# Altium PCB uart_key.PcbDoc
Units mm, origin at the board's own origin, x right, y up, seen from the top; angles counter-clockwise.
Board outline 80.99 x 54 mm, 2 copper layers (Top Layer, Bottom Layer); 71 components, 46 nets, 382 pads, 76 vias.
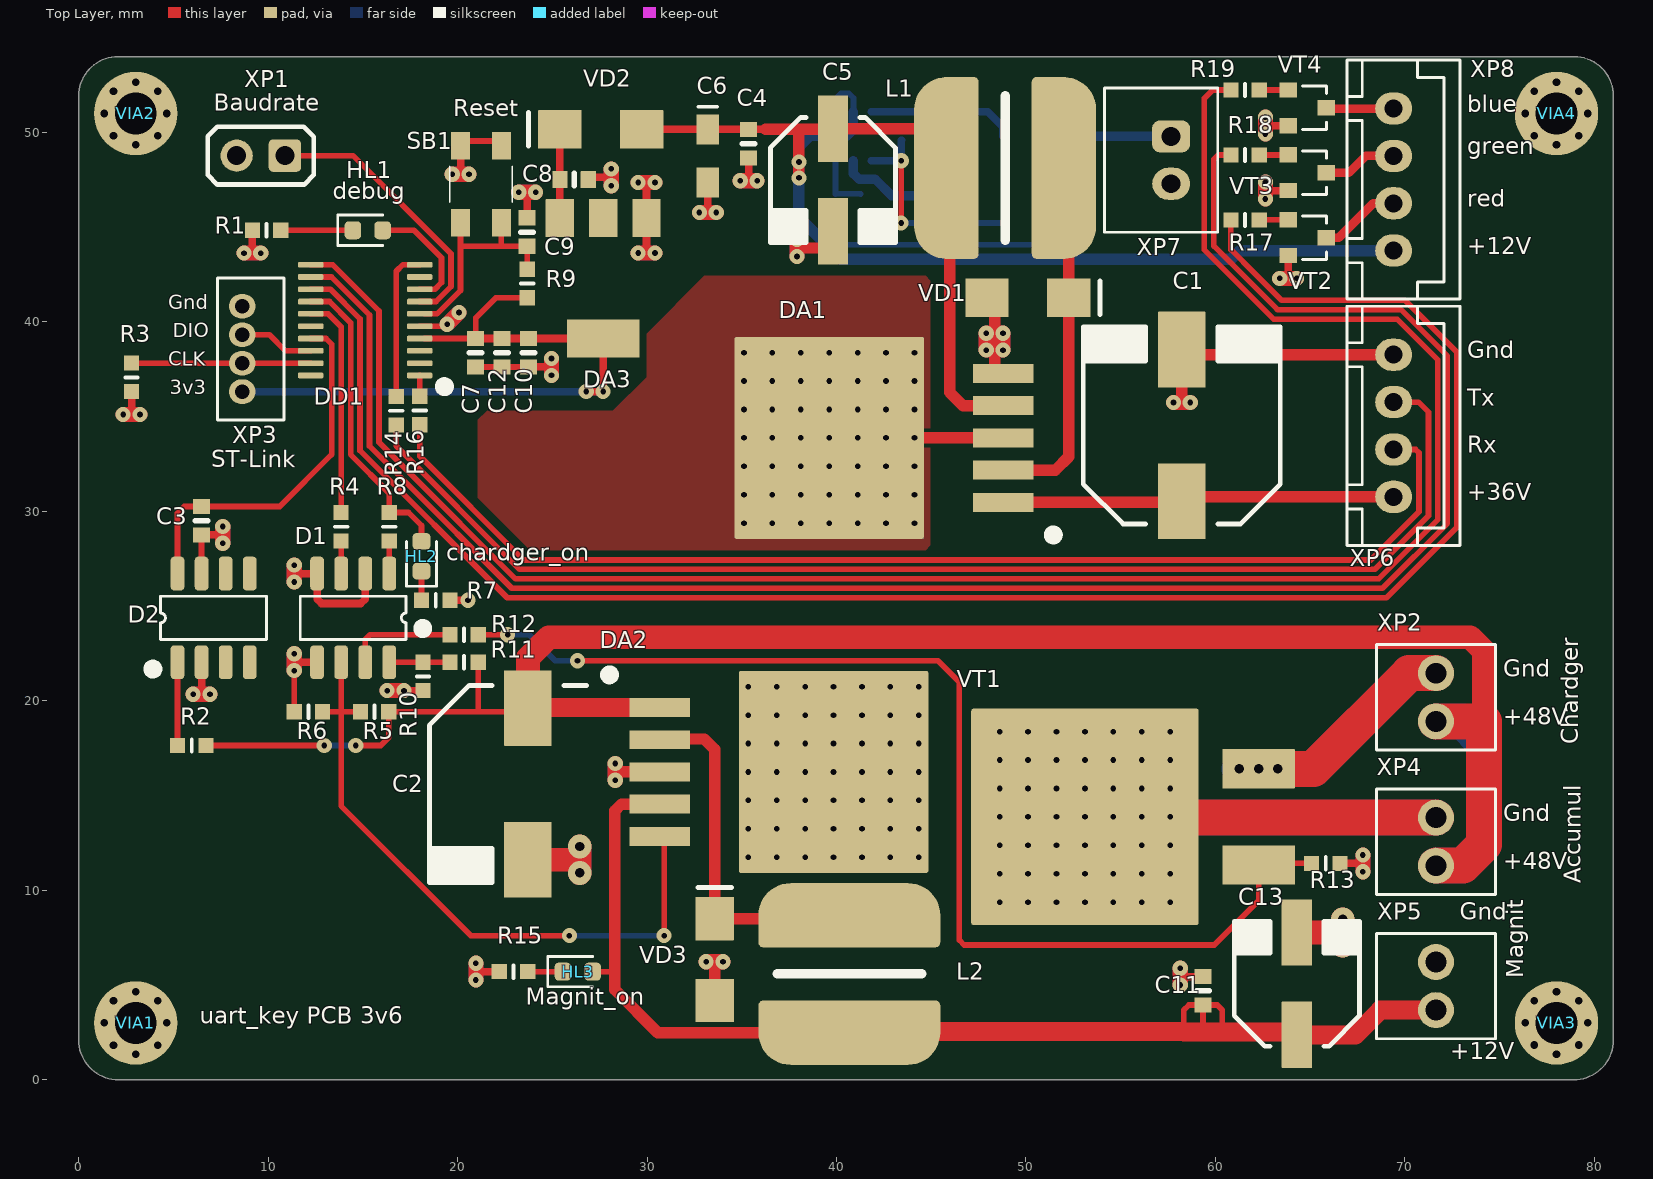
[diagram p0: Top Layer view]
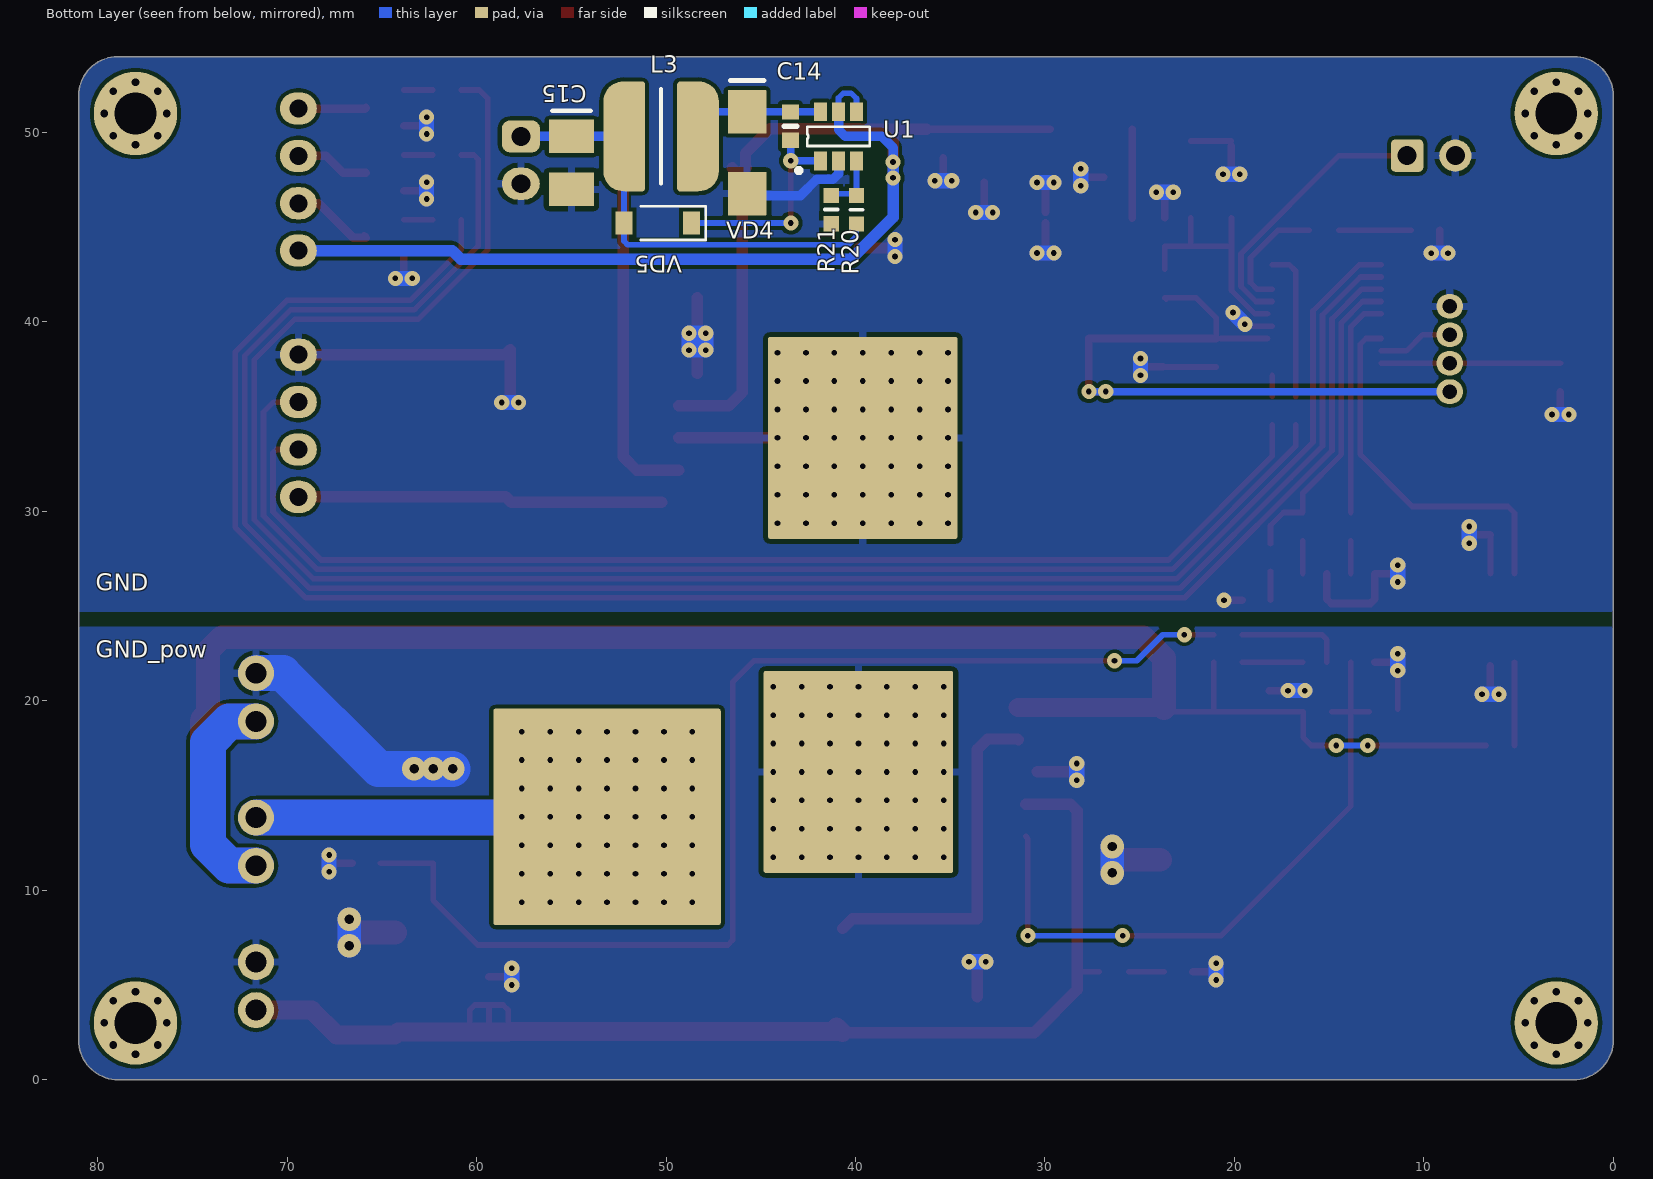
[diagram p1: Bottom Layer view, seen from below]

## Layer stack, top to bottom
Top Solder: solder mask 0.0102, Solder Resist, Dk 3.5
Top Layer: signal copper 0.0356
Dielectric 1: dielectric 0.32, FR-4, Dk 4.8
Bottom Layer: signal copper 0.0356
Bottom Solder: solder mask 0.0102, Solder Resist, Dk 3.5

## Board outline
0.006,2.084 0.006,51.924 cw(c2.076,51.924) 2.076,53.994 78.931,53.994 cw(c78.93,51.924) 81,51.924 81,2.084 cw(c78.909,2.084) 78.909,-0.007 2.097,-0.006 cw(c2.097,2.084)

## Design rules (kind name [scope] priority, off if disabled: settings)
Clearance TestPointToPad [HasFootprint('TP_36_PAD') or HasFootprint('TP_38_PAD') or HasFootprint('TP_47_PAD') or HasFootprint('TP_50_PAD') or HasFootprint('TP_60_PAD') or HasFootprint('TP_80_PAD') or HasFootprint('TP_100_PAD') vs IsPad] p1: gap=0.22 ignorepadtopadclearanceinfootprint=FALSE except(0: Arc-Hole Track-Hole SMDPad-Hole THPad-Hole Via-Hole Fill-Hole Poly-Hole Region-Hole Text-Hole; 2: Arc-THPad Track-THPad SMDPad-THPad THPad-THPad)
Clearance [All] p2: gap=0.2 ignorepadtopadclearanceinfootprint=FALSE
ComponentClearance TestpointClearance [Footprint Like 'TP_36_PAD' or Footprint Like 'TP_38_PAD' or Footprint Like 'TP_47_PAD' or Footprint Like 'TP_50_PAD' or Footprint Like 'TP_60_PAD' or Footprint Like 'TP_80_PAD' or Footprint Like 'TP_100_PAD' vs Footprint Like 'TP_36_PAD' or Footprint Like 'TP_38_PAD' or Footprint Like 'TP_47_PAD' or Footprint Like 'TP_50_PAD' or Footprint Like 'TP_60_PAD' or Footprint Like 'TP_80_PAD' or Footprint Like 'TP_100_PAD'] p1: gap=0 collisioncheckmode=3 verticalgap=0.254 showdistances=FALSE
ComponentClearance [All] p2: gap=0.254 collisioncheckmode=3 verticalgap=0.254 showdistances=FALSE
DiffPairsRouting [All] p1: maxlimit=0.25 minlimit=0.2 mostfreqgap=0.22 toplayer_minwidth=0.2 toplayer_maxwidth=0.25 toplayer_prefwidth=0.22 bottomlayer_minwidth=0.2 bottomlayer_maxwidth=0.25 bottomlayer_prefwidth=0.22 maxuncoupledlength=12.7
HoleSize [All] p1: absolutevalues=TRUE maxlimit=4 minlimit=0.3 maxpercent=80.000 minpercent=20.000
MinimumSolderMaskSliver [All] p1: minsoldermaskwidth=0.1
PasteMaskExpansion [All] p1: expansion=-0.05
PlaneConnect [All] p1: planeconnectstyle=Relief reliefexpansion=0.508 reliefentries=4 reliefconductorwidth=0.4 reliefairgap=0.25
PolygonConnect PolygonConnect_1 [IsVia or InPadClass('Direct')] p1: connectstyle=Direct reliefconductorwidth=0.254 reliefentries=4 polygonreliefangle="90 Angle" airgapwidth=0.254
PolygonConnect [All] p2: connectstyle=Relief reliefconductorwidth=0.4 reliefentries=4 polygonreliefangle="90 Angle" airgapwidth=0.25
RoutingVias [All] p1: holewidth=0.3 width=1 viastyle="Through Hole" minholewidth=0.3 minwidth=0.7 maxholewidth=0.4 maxwidth=2.8
SilkToSilkClearance [All] p1: silktosilkclearance=0.2
SilkToSolderMaskClearance [IsPad] p1: minsilkscreentomaskgap=0.2 clearancetoexposedcopper=TRUE
SolderMaskExpansion [All] p1: expansion=0.1 istentingtop=FALSE
Width [All] p1: maxlimit=4 minlimit=0.22 preferedwidth=0.4
22 further rules are at their usual default settings.

## Components (designator, comment, footprint, x,y, rotation, side; value= is the part's Value field where it differs from the comment)
C1 "220uF 50V" CAPAE_SMD_1010 58.225,34.531 r270 top value=220uF
C2 "220uF 50V" CAPAE_SMD_1010 23.712,15.608 r90 top value=220uF
C3 "1uF 25V" CC0603_0.8mm 6.488,29.503 r270 top value=1uF
C4 "1uF 25V" CC0603_0.8mm 35.365,49.402 r270 top value=1uF
C5 "220uF 16V" CAPAE_SMD_0607 39.81,47.485 r90 top value=220uF
C6 "2.2uF 16V" TANT_3.2X1.6_A 33.206,48.752 r270 top value=2.2uF
C7 "0.15uF 50V" CC0603_0.8mm 20.955,38.366 r270 top value=0.15uF
C8 "10uF 25V" CC0603_0.8mm 26.15,47.498 r0 top value=10uF
C9 "1uF 25V" CC0603_0.8mm 23.673,44.737 r90 top value=1uF
C10 "10uF 25V" CC0603_0.8mm 23.749,38.366 r270 top value=10uF
C11 "1uF 25V" CC0603_0.8mm 59.345,4.686 r90 top value=1uF
C12 "0.15uF 50V" CC0603_0.8mm 22.352,38.366 r270 top value=0.15uF
C13 "220uF 16V" CAPAE_SMD_0607 64.298,5.067 r270 top value=220uF
C14 "0.01uF 50V" CC0603_0.8mm 43.434,50.329 r90 bottom value=0.01uF
C15 "22uF 10В" TANT_3.5X2.8_B 54.991,48.387 r90 bottom value=22uF
D1 "MOCD217R2M" SO-8_height 14.489,24.371 r180 top
D2 "MOCD217R2M" SO-8_height 7.123,24.371 r0 top
DA1 "LM2596HVGR-12" "TO-263-5 (D2PAK)_2_thermal_pad" 43.766,33.873 r180 top
DA2 "LM2596HVGR-12" "TO-263-5 (D2PAK)_2_thermal_pad" 35.693,16.242 r0 top
DA3 "AMS1117-3.3V" SOT-223 27.686,42.291 r90 top value=3.3V
DD1 "STM32G030F6" TSSOP-20_ST 15.124,40.091 r90 top
HL1 "led_1608_green" led_1608 14.478,44.831 r0 top
HL2 "led_1608_red" led_1608 18.095,26.841 r90 top
HL3 "led_1608_red" led_1608 25.56,5.702 r0 top
L1 "SDR1006 33uH" SDR1006 48.902,48.12 r180 top value=33uH
L2 "SDR1006 33uH" SDR1006 40.676,5.58 r270 top value=33uH
L3 "SDR0604 10uH" SDR0604 50.26,49.784 r0 bottom value=10uH
R1 "10k ±1%" R0603 9.918,44.831 r180 top value=10k
R2 "10k ±1%" R0603 5.968,17.64 r0 top value=10k
R3 "10k ±1%" R0603 2.794,37.066 r90 top value=10k
R4 "100 ±1%" R0603 13.854,29.185 r270 top value=100
R5 "10k ±1%" R0603 15.62,19.418 r180 top value=10k
R6 "10k ±1%" R0603 12.127,19.418 r180 top value=10k
R7 "10k ±1%" R0603 18.845,25.305 r0 top value=10k
R8 "100 ±1%" R0603 16.394,29.185 r270 top value=100
R9 "10k ±1%" R0603 23.673,42.019 r90 top value=10k
R10 "10k ±1%" R0603 18.172,21.281 r270 top value=10k
R11 "10k ±1%" R0603 20.344,22.031 r0 top value=10k
R12 "100 ±1%" R0603 20.344,23.482 r0 top value=100
R13 "10k ±1%" R0603 65.822,11.417 r0 top value=10k
R14 "100 ±1%" R0603 16.764,35.306 r270 top value=100
R15 "10k ±1%" R0603 22.951,5.702 r180 top value=10k
R16 "100 ±1%" R0603 17.999,35.318 r270 top value=100
R17 "100 ±1%" R0603 61.564,45.377 r0 top value=100
R18 "100 ±1%" R0603 61.564,48.806 r0 top value=100
R19 "100 ±1%" R0603 61.564,52.235 r0 top value=100
R20 "56k ±5%" R0603 39.947,45.91 r90 bottom value=56k
R21 "10k ±1%" R0603 41.275,45.922 r270 bottom value=10k
SB1 "KLS7-TS3401_4х3х2,5" KLS7-TS3401_4х3х2,5 20.161,45.233 r90 top
U1 "LM2734YMK" SOT-23-6 40.894,49.784 r270 bottom
VD1 "SS16" "DO-214AC (SMA)" 50.097,41.262 r180 top
VD2 "SS16" "DO-214AC (SMA)" 27.559,50.152 r0 top
VD3 "SS16" "DO-214AC (SMA)" 33.564,6.337 r270 top
VD4 "SS16" "DO-214AC (SMA)" 45.72,48.92 r270 bottom
VD5 "1N4148W" SOD-123 48.664,45.212 r0 bottom
VIA1 "via_circle_2.2mm" via_circle_2.2 3.006,2.994 r0 top
VIA2 "via_circle_2.2mm" via_circle_2.2 3.006,50.994 r0 top
VIA3 "via_circle_2.2mm" via_circle_2.2 78,2.994 r0 top
VIA4 "via_circle_2.2mm" via_circle_2.2 78,50.994 r0 top
VT1 "IRF630NSPBF" "TO-263A (D2PAK)_thermal_pad" 53.765,13.868 r180 top
VT2 "IRLML2060" SOT-23 64.842,44.437 r180 top
VT3 "IRLML2060" SOT-23 64.842,47.866 r180 top
VT4 "IRLML2060" SOT-23 64.842,51.295 r180 top
XP1 "Baudrate" PLS-2 9.612,48.768 r180 top
XP2 "Зарядное устройство" DG308x2 71.638,18.91 r90 top
XP3 "ST-Link" B4B-ZR 8.636,36.316 r90 top
XP4 "На аккумулятор" DG308x2 71.638,11.29 r90 top
XP5 "Магнит" DG308x2 71.638,3.67 r90 top
XP6 "COM" JST_XH_B4B-XH-A_1x04_P2.50mm_Vertical 69.401,30.761 r90 top
XP7 "Зарядное устройство на руле" B2B-XH-A 57.658,49.784 r270 top
XP8 "LED" JST_XH_B4B-XH-A_1x04_P2.50mm_Vertical 69.401,43.755 r90 top

## Footprints (in the part's own frame and the unit in brackets; to place one, negate y for a bottom-side part, rotate by r counter-clockwise, add the part's x,y. Pads: shape width x height; smd on the part's side, far side on the other; paste and mask are expansions set on the pad)
B2B-XH-A [mm]
  rrect50% 1.7x2 hole 1: 1(0,0)
  oval 1.7x2 hole 1: 2(2.5,0)
  silkscreen extent -2.56,-3.51 5.06,2.46, body extent -2.45,-3.4 4.95,2.35, height 7
B4B-ZR [mm]
  oval 1.3x1.4 hole 0.762: 1(0,0) 2(1.5,0) 3(3,0) 4(4.5,0)
  silkscreen extent -1.5,-2.2 6,1.3, body extent -1.5,-2.2 6,1.3, height 4.5
CAPAE_SMD_0607 [mm] "SMD Aluminum Electrolytic Capacitor. DxL = 6.3x7.7mm."
  rrect2% 3.5x1.6 smd paste-10.05: 1(-2.7,0) 2(2.7,0)
  silkscreen extent -3.3,-3.3 3.3,3.3, body extent -3.6,-3.3 3.6,3.3, height 7.7
CAPAE_SMD_1010 [mm] "SMD Aluminum Electrolytic Capacitor. DxL = 10.0x10.0mm."
  rrect2% 4x2.5 smd paste-10.05: 1(-4,0) 2(4,0)
  silkscreen extent -5.2,-5.2 5.2,5.2, body extent -5.5,-5.2 5.5,5.2, height 10
CC0603_0.8mm [mm] "Yageo/ Radiused inverted home plate (RIHP) paste"
  rrect2% 0.8x0.9 smd paste-2: 1(-0.75,0) 2(0.75,0)
  Top Layer pour cut-out: -0.375,0.65 -0.375,-0.65 0.375,-0.65 0.375,0.65
  silkscreen extent 0,-0.33 0,0.33, body extent -0.8,-0.4 0.8,0.4, height 0.78
DG308x2 [mm]
  round 1.9 hole 1.1: 1(0,0) 2(2.54,0)
  silkscreen extent -1.51,-3.14 4.05,3.14, body extent -1.3,-3.2 3.78,3.1, height 8.54
"DO-214AC (SMA)" [mil]
  rrect2% 90x80 smd: 1(-85,0) 2(85,0)
  silkscreen extent -150,-35 -150,35, body extent -102,-51 102,51, height 95
JST_XH_B4B-XH-A_1x04_P2.50mm_Vertical [mm]
  oval 1.7x1.95 hole 0.95: 1(0,0) 2(2.5,0) 3(5,0) 4(7.5,0)
  silkscreen extent -2.56,-3.51 10.06,2.46, body extent -2.45,-3.4 9.95,2.35, height 7
KLS7-TS3401_4х3х2,5 [mm]
  rect 1.45x1 smd: COM(0,0) COM(0,-2.15) NO(4.05,-2.15) NO(4.05,0)
  silkscreen extent 1.07,-2.73 2.97,0.58, body extent -0.5,-2.73 4.6,0.57, height 2.5
led_1608 [mm]
  rrect50% 0.875x0.95 smd: 1(0,0) 2(1.57,0)
  silkscreen extent -0.8,-0.8 1.57,0.8, body extent 0,-0.4 1.6,0.4, height 1.1
PLS-2 [mm]
  rrect25% 1.7x1.7 hole 1: 1(-1.27,0)
  round 1.7 hole 1: 2(1.27,0)
  silkscreen extent -2.79,-1.52 2.79,1.52, body extent -2.54,-1.27 2.54,1.27, height 8.44
R0603 [mm]
  rect 0.8x0.8 smd paste-2: 1(-0.75,0) 2(0.75,0)
  Top Layer pour cut-out: -0.5,0.6 -0.5,-0.6 0.5,-0.6 0.5,0.6
  Top Layer pour cut-out: -0.5,0.6 0.5,0.6 0.5,-0.6 -0.5,-0.6
  silkscreen extent 0,-0.33 0,0.33, body extent -0.8,-0.4 0.8,0.4, height 0.37
SDR0604 [mm]
  oval 2.1x5.8 smd paste-5: 1(-2,0) 2(2,0)
  rrect25% 1.2x5.8 smd paste-5: 1(-1.45,0) 2(1.45,0)
  silkscreen extent 0,-2.5 0,2.5, body extent -2.75,-2.8 2.75,2.8, height 4.55
SDR1006 [mm]
  oval 3.4x9.6 smd paste-5: 1(-3.1,0) 2(3.1,0)
  rrect25% 2x9.6 smd paste-5: 1(-2.4,0) 2(2.4,0)
  silkscreen extent 0,-3.81 0,3.81, body extent -4.89,-4.9 4.89,4.9, height 5.93
SO-8_height [mm] "SOIC, 8-Leads, Body 4.90x3.90mm, Pitch 1.27mm, IPC Medium Density"
  rrect50% 0.72x1.78 smd paste-0.05: 1(-1.905,-2.34) 2(-0.635,-2.34) 3(0.635,-2.34) 4(1.905,-2.34) 5(1.905,2.34) 6(0.635,2.34) 7(-0.635,2.34) 8(-1.905,2.34)
  silkscreen extent -3.92,-1.14 2.79,1.14, body extent -2.92,-2.96 2.92,2.96, height 3.33
SOD-123 [mm]
  rect 0.9x1.2 smd: 1(0,0) 2(3.554,0)
  silkscreen extent -0.76,-0.89 2.67,0.89, body extent -0.17,-0.9 3.73,0.9, height 1.18
SOT-23 [mil]
  rrect2% 36x32 smd: 1(39.5,-37) 2(39.5,37) 3(-39.5,0)
  silkscreen extent -40,-45 10,45, body extent -49,-59 49,59, height 43
SOT-23-6 [mm] "SOT23, 6-Leads, Body 2.92x2.84mm, Pitch 0.95mm, IPC Medium Density"
  rrect2% 0.99x0.69 smd paste-0.05 mask+0.05: 1(1.295,-0.95) 2(1.295,0) 3(1.295,0.95) 4(-1.295,0.95) 5(-1.295,0) 6(-1.295,-0.95)
  silkscreen extent -0.51,-2.23 1.92,1.65, body extent -1.5,-1.5 1.5,1.5, height 1.3
SOT-223 [mil]
  rrect2% 79x59 smd: 1(125,-90) 2(125,0) 3(125,90)
  rrect2% 79x150 smd paste-1000: 2(-125,0)
  body extent -136,-128 136,128, height 64
TANT_3.2X1.6_A [mm] "SMD Aluminum Electrolytic Capacitor. DxL = 6.3x7.7mm."
  rrect2% 1.6x1.2 smd: 1(1.4,0) 2(-1.4,0)
  silkscreen extent -2.6,-0.5 -2.6,0.5, body extent -1.6,-0.8 1.6,0.8, height 1.6
TANT_3.5X2.8_B [mil]
  rrect2% 70x94 smd: 1(-55,0) 2(55,0)
  silkscreen extent 108,-39 108,39, body extent -73,-58 73,58, height 80
"TO-263-5 (D2PAK)_2_thermal_pad" [mm] "D2-PAK, 6-Pads, Body 7,77x8,48mm (max), IPC Medium Density"
  rrect2% 3.2x1 smd: 1(-5.025,3.4) 2(-5.025,1.7) 3(-5.025,0) 4(-5.025,-1.7) 5(-5.025,-3.4)
  round 0.8 hole 0.3: 6(-0.35,4.5) 6(-0.35,3) 6(-0.35,1.5) 6(-0.35,0) 6(-0.35,-1.5) 6(-0.35,-3) 6(-0.35,-4.5) 6(1.15,4.5) 6(1.15,3) 6(1.15,1.5) 6(1.15,0) 6(1.15,-1.5) 6(1.15,-3) 6(1.15,-4.5) 6(2.65,4.5) 6(2.65,1.5) 6(2.65,3) 6(2.65,0) 6(2.65,-3) 6(2.65,-1.5) 6(2.65,-4.5) 6(4.15,3) 6(4.15,4.5) 6(4.15,-1.5) 6(4.15,0) 6(4.15,1.5) 6(4.15,-4.5) 6(4.15,-3) 6(5.65,3) 6(5.65,4.5) 6(5.65,-1.5) 6(5.65,0) 6(5.65,1.5) 6(5.65,-4.5) 6(5.65,-3) 6(7.15,-4.5) 6(7.15,-3) 6(7.15,-1.5) 6(7.15,0) 6(7.15,1.5) 6(7.15,3) 6(7.15,4.5) 6(8.65,-4.5) 6(8.65,-3) 6(8.65,-1.5) 6(8.65,0) 6(8.65,1.5) 6(8.65,3) 6(8.65,4.5)
  rrect2% 10x10.66 smd paste-25: 6(4.15,0)
  rrect2% 10x10.66 smd far side paste-25: 6(4.15,0)
  silkscreen extent -7.92,4.88 -7.43,5.37, body extent -5.12,-5.08 8.89,5.08, height 4.56
"TO-263A (D2PAK)_thermal_pad" [mm]
  rrect2% 3.81x2.08 smd: 1(-8.517,2.54) 3(-8.517,-2.54)
  round 0.8 hole 0.3: 2(-3.845,3) 2(-3.845,4.5) 2(-3.845,-1.5) 2(-3.845,0) 2(-3.845,1.5) 2(-3.845,-4.5) 2(-3.845,-3) 2(-2.345,4.5) 2(-2.345,1.5) 2(-2.345,3) 2(-2.345,0) 2(-2.345,-3) 2(-2.345,-1.5) 2(-2.345,-4.5) 2(-0.845,4.5) 2(-0.845,3) 2(-0.845,1.5) 2(-0.845,0) 2(-0.845,-1.5) 2(-0.845,-3) 2(-0.845,-4.5) 2(0.655,4.5) 2(0.655,3) 2(0.655,1.5) 2(0.655,0) 2(0.655,-1.5) 2(0.655,-3) 2(0.655,-4.5) 2(2.155,4.5) 2(2.155,1.5) 2(2.155,3) 2(2.155,0) 2(2.155,-3) 2(2.155,-1.5) 2(2.155,-4.5) 2(3.655,3) 2(3.655,4.5) 2(3.655,-1.5) 2(3.655,0) 2(3.655,1.5) 2(3.655,-4.5) 2(3.655,-3) 2(5.155,3) 2(5.155,4.5) 2(5.155,-1.5) 2(5.155,0) 2(5.155,1.5) 2(5.155,-4.5) 2(5.155,-3)
  rrect2% 12x11.43 smd paste-20: 2(0.655,0)
  rrect2% 12x11.43 smd far side paste-20: 2(0.655,0)
  body extent -9.86,-5.32 5.99,5.32, height 4.8
TSSOP-20_ST [mm] "TSSOP, 20-Leads, Body 6.50x4.40mm, Pitch 0.65mm, ST recommend footprint"
  rrect50% 0.3x1.35 smd paste-0.025 mask+0.075: 1(-2.925,-2.875) 2(-2.275,-2.875) 3(-1.625,-2.875) 4(-0.975,-2.875) 5(-0.325,-2.875) 6(0.325,-2.875) 7(0.975,-2.875) 8(1.625,-2.875) 9(2.275,-2.875) 10(2.925,-2.875) 11(2.925,2.875) 12(2.275,2.875) 13(1.625,2.875) 14(0.975,2.875) 15(0.325,2.875) 16(-0.325,2.875) 17(-0.975,2.875) 18(-1.625,2.875) 19(-2.275,2.875) 20(-2.925,2.875)
  silkscreen extent -3.76,-4.43 -3.27,-3.93, body extent -3.25,-3.21 3.25,3.21, height 0.98
via_circle_2.2 [mm]
  round 0.7 hole 0.4: 1(-1.649,0) 1(-1.166,-1.166) 1(-1.166,1.167) 1(0,-1.65) 1(0,1.65) 1(1.167,-1.166) 1(1.167,1.167) 1(1.651,0)
  round 4.4 hole 2.2: 1(0,0)

## Part data
C1 C2: library part Capacitor_elec, Tolerance=±10%, Voltage=50V, Link1=https://www.chipdip.ru/product0/9000565744, Name=Capacitor_elec, Type="Конденсатор электр."
C3 C4 C8 C9 C10 C11: library part Capacitor, Tolerance=±10%, Voltage=25V, Name=Capacitor, Type="Конденсатор керам."
  C3 C4 C9 C11: Link1=https://www.chipdip.ru/product/grm188r71e105ka12d
  C8 C10: Link1=https://www.chipdip.ru/product/grm188r61e106m
C5 C6 C13: library part Capacitor_elec, Tolerance=±10%, Voltage=16V, Name=Capacitor_elec, Type="Конденсатор электр."
  C5 C13: Link1=https://www.chipdip.ru/product0/9000565741
  C6: Link1=https://www.chipdip.ru/product0/9000686417
C7 C12 C14: library part Capacitor, Tolerance=±10%, Voltage=50V, Name=Capacitor, Type="Конденсатор керам."
  C7 C12: Link1=https://www.chipdip.ru/product0/9000081151
  C14: Link1=https://www.chipdip.ru/product0/9000143994
C15: library part Capacitor_elec, Tolerance=±10%, Voltage=10В, Link1=https://www.chipdip.ru/product0/9000502415, Name=Capacitor_elec, Type="Конденсатор электр."
DA3: library part AMS1117-___V, Link1=https://www.chipdip.ru/product/ams1117-3.3, Name=AMS1117-, Type=LDO
DD1: "ARM-based 32-bit MCU, up to 32 KB Flash, crystal-less USB  FS 2.0, CAN, 8 timers, ADC & comm. interfaces, 2.0 - 3.6 V", Name=STM32G030F6, Type=Микроконтроллер
L1 L2 L3: library part Inductor, Type=Индуктивность
  L1 L2: Link1=https://www.chipdip.ru/product/sdr1006-330kl, Name=SDR1006
  L3: Link1=https://www.chipdip.ru/product/sdr0604-100ml, Name=SDR0604
R1 R2 R3 R4 R5 R6 R7 R8 R9 R10 R11 R12 R13 R14 R15 R16 R17 R18 R19 R21: library part Res_0603, Tolerance=±1%, Name=R0603, Type="Резистор SMD"
  R1 R2 R3 R5 R6 R7 R9 R10 R11 R13 R15 R21: Link1=https://www.chipdip.ru/product0/9000079736
  R4 R8 R12 R14 R16 R17 R18 R19: Link1=https://www.chipdip.ru/product0/9000079616
R20: library part Res_0603, Tolerance=±5%, Link1=https://www.chipdip.ru/product0/32172, Name=R0603, Type="Резистор SMD"
SB1: library part Tact_4х3х2.5_SMD, Link1=https://www.chipdip.ru/product/kls7-ts3401-2-5-180-tvaf11, Name=KLS7-TS3401_4х3х2,5, Type="Кнопка тактовая"
VD5: library part Diode, Link1=https://www.chipdip.ru/product/1n4148w-5, Name=1N4148W, Type=Диод
XP1 XP7: library part Conn_01_02pin
  XP1: Link1=https://www.chipdip.ru/product/pls-2, Name=Baudrate, Type=PLS-2
  XP7: +5V=+5V, Circuit_2=Gnd, Link1=https://www.chipdip.ru/product0/8384581689, Link2=*https://www.chipdip.ru/product/xhp-2, Link3=*https://www.chipdip.ru/product/sxh-001t-0.6, Name=B2B-XH-A, Type=Разъём
XP2 XP4 XP5: library part DG308x2, Circuit_2=Gnd, Link1=https://www.chipdip.ru/product/dg308-2.54-02p-14-00ah, Name=DG308x2, Type=Клеммник
  XP2 XP4: Circuit_1=+48V
  XP5: Circuit_1=+12V
XP3: library part B4B-ZR_conn_01x04_st_link, Circuit_1=Vcc, Circuit_2=CLK, Circuit_3=DIO, Circuit_4=Gnd, Link1=https://www.chipdip.ru/product/b4b-zr, Name=B4B-ZR, Type=Разъём
XP6 XP8: library part JST_XH_B4B-XH-A_1x04_P2.50mm_Vertical, Link1=https://www.chipdip.ru/product/b4b-xh-a, Link2=https://www.chipdip.ru/product/xhp-4?from=rec_product, Link3=https://www.chipdip.ru/product/sxh-001t-0.6?from=rec_product, Name=JST_XH_B4B-XH-A_1x04_P2.50mm_Vertical, Type=Разъём
  XP6: Circuit_1=+36V, Circuit_2=Rx, Circuit_3=Tx, Circuit_4=Gnd
  XP8: Circuit_1=+12Vout, Circuit_2=led_r, Circuit_3=led_g, Circuit_4=led_b
D1 D2: Link1=https://www.chipdip.ru/product/mocd217r2m, Name=MOCD217R2M, Type=Оптопара
DA1 DA2: Link1=https://www.chipdip.ru/product/lm2596hvgr-12, Name=LM2596HVGR-12, Type=DC-DC
HL1: Link1=https://www.chipdip.ru/product/to-1608bc-pg, Name=led_1608_green, Type=Светодиод
HL2 HL3: Link1=https://www.chipdip.ru/product/to-1608bc-mre, Name=led_1608_red, Type=Светодиод
U1: Link1=https://www.chipdip.ru/product/lm2734ymk-nopb, Name=LM2734YMK, Type=DCDC
VD1 VD2 VD3 VD4: Link1=https://www.chipdip.ru/product/ss16, Name=SS16, Type="Диод Шоттки"
VIA1 VIA2 VIA3 VIA4: Name=via_circle_2.2mm, Type="Отверстие для крепежа"
VT1: Link1=https://www.chipdip.ru/product/irf630nspbf, Name=IRF630NSPBF, Type="MOSFET N-chanel"
VT2 VT3 VT4: Link1=https://www.chipdip.ru/product/irlml2060trpbf, Name=IRLML2060, Type="MOSFET N-chanel"

## Via types
v1: diameter 0.8, hole 0.3, Top Layer to Bottom Layer, tented both sides, 69 vias
v2: diameter 1.25, hole 0.5, Top Layer to Bottom Layer, tented both sides, 7 vias

## Nets (pads, with @x,y where several pads share a name; then routed paths per layer and width w, separated by ;. In a path a pad name is that pad's centre, name@x,y a point inside that pad or via, vN(x,y) a via of type N, cw(c..) or ccw(c..) an arc to the next point about the centre after c; other vN are vias at no path point)
+3.3V: C7.1 C10.1 C12.1 DA3.2 DD1.4 R9.1 XP3.1 | length 36.3
  Top Layer w0.3: DD1.4@18.253,39.116 C7.1@20.701,39.116 ; C7.1 20.955,40.205 22.019,41.269 R9.1 R9.1@23.599,41.196 ; C12.1 C12.1@22.359,39.123 ; DA3.2@27.68,39.11 DA3.2@27.686,39.116
  Top Layer w0.4: C7.1 C12.1 C10.1 DA3.2@27.686,39.116 ; v1(26.791,36.316) v1(27.68,36.316) DA3.2@27.68,39.11
  Bottom Layer w0.4: XP3.1 v1(26.791,36.316) v1(27.68,36.316)
+12V: C4.1 C5.2 C6.2 DA1.4 L1.2 U1.4 U1.5 VD2.2 XP8.1 | length 79.4
  Top Layer w0.4: VD2.2 C6.2 C4.1 36.254,50.152
  Top Layer w0.6: 36.254,50.152 38.016,50.152 ; v1(38.016,47.596) v1(38.016,48.438) 38.016,50.152 ; L1.2@45.769,48.153 L1.2@45.802,48.12 ; L1.2@46.021,47.639 L1.2@46.502,48.12 ; DA1.4@49.335,35.573 46.677,35.573 45.974,36.276 45.974,47.948 L1.2@45.802,48.12 ; 38.016,50.152 39.777,50.152 C5.2 44.509,50.185 45.802,48.892 L1.2@45.802,48.12
  Bottom Layer w0.3: U1.4 U1.4@40.099,51.234 ; U1.4@39.947,51.234 39.947,51.783 40.234,52.07 40.64,52.07 40.894,51.816 U1.5
  Bottom Layer w0.5: v1(38.016,48.438) 38.016,49.192 38.608,49.784 40.543,49.784 40.894,50.135 U1.5
  Bottom Layer w0.6: v1(38.016,47.596) v1(38.016,48.438) ; v1@38.016,47.676 38.016,45.517 40.225,43.307 60.833,43.307 61.281,43.755 XP8.1
+12V_magnit: C11.1 C13.2 DA2.4 HL3.2 L2.2 XP5.1 | length 65.1
  Top Layer w0.3: HL3.2 28.273,5.702 ; 58.329,2.367 58.329,2.523 58.329,3.67 58.595,3.936 C11.1 ; 59.345,2.367 59.345,2.523 C11.1 ; 60.361,2.367 60.361,2.523 60.361,3.67 60.095,3.936 C11.1
  Top Layer w0.6: DA2.4@31.014,14.543 31.012,14.542 28.651,14.542 28.3,14.19 28.3,5.702 28.3,4.743 30.563,2.48 L2.2@40.676,2.48
  Top Layer w1: L2.2@40.676,2.48 L2.2@40.99,2.794 ; L2.2@40.736,2.54 58.329,2.54 ; 58.329,2.523 59.345,2.523 60.361,2.523 64.143,2.523 C13.2 67.391,2.367 68.694,3.67 XP5.1
+36V: C1.2 DA1.1 XP6.1 | length 19.3
  Top Layer w0.6: DA1.1@50.224,30.467 58.161,30.467 C1.2 58.455,30.761 XP6.1
+48V_charger: C2.2 DA2.1 R2.2 R5.1 R11.2 XP2.1 XP4.1 | length 109.7
  Top Layer w0.3: R2.2 v1(12.965,17.64) ; v1(14.624,17.64) 15.944,17.64 16.37,18.066 R5.1 21.118,19.418 ; R11.2 21.094,19.442 21.118,19.418 ; C2.2@23.849,19.418 21.118,19.418
  Top Layer w1: C2.2@23.951,19.647 DA2.1@31.414,19.647
  Top Layer w1.25: C2.2 23.712,22.251 24.816,23.355 73.436,23.355 74.168,22.623 74.168,18.91
  Top Layer w1.9: XP4.1 73.055,11.29 74.168,12.403 74.168,18.91 XP2.1
  Bottom Layer w0.3: v1(12.965,17.64) v1(14.624,17.64)
  Bottom Layer w1.9: XP4.1 73.055,11.29 74.168,12.403 74.168,17.797 73.055,18.91 XP2.1
baud: DD1.7 XP1.1 | length 14.6
  Top Layer w0.3: XP1.1 14.474,48.768 19.653,43.589 19.653,41.86 18.858,41.066 DD1.7
CLK: DD1.19 R3.2 XP3.2 | length 9.5
  Top Layer w0.3: R3.2 XP3.2 DD1.19
DIO: DD1.18 XP3.3 | length 4
  Top Layer w0.3: XP3.3 10.072,39.316 10.922,38.466 DD1.18
GND: C1.1 C3.2 C4.2 C5.1 C6.1 C7.2 C8.2 C9.2 C10.2 C12.2 C15.1 D1.2 D1.4 D2.7 DA1.3 DA1.5 DA1.6 DA3.1 DD1.5 R1.2 R3.1 R7.2 R21.2 SB1.NO U1.2 VD1.2 VD4.2 VT2.2 VT3.2 VT4.2 XP1.2 XP3.4 XP6.4 XP7.2 | length 110.8
  Top Layer w0.3: D2.7 C3.2 ; DD1.5 v1@19.213,39.766 ; v1@19.29,39.69 v1@19.366,39.766 ; v1@19.388,39.766 v1@19.366,39.766 ; v1@19.423,39.84 v1(19.449,39.866) 19.313,39.866 v1@19.213,39.766 ; v1@19.525,39.79 19.39,39.79 v1@19.366,39.766 ; SB1.NO@20.161,49.537 SB1.NO@22.311,49.537 ; C7.2 C12.2 C10.2 ; v1@19.213,39.766 v1@19.366,39.766
  Top Layer w0.4: 2.794,35.109 R3.1 ; C3.2 7.603,28.753 ; 9.168,43.624 R1.2 ; 11.377,26.711 D1.4 12.584,25.368 12.818,25.133 14.889,25.133 15.124,25.368 D1.2 ; R7.2 v1(20.548,25.305) ; 20.161,47.788 SB1.NO@20.161,49.283 ; C9.2 23.673,46.835 ; C10.2 24.956,37.616 ; C8.2@26.9,47.625 28.107,47.625 ; 29.972,43.63 DA3.1@29.972,45.212 ; DA3.1@29.972,45.771 29.972,47.352 ; 33.206,45.771 C6.1 ; 35.365,47.446 C4.2 ; 62.632,46.927 VT3.2 ; 62.632,50.356 VT4.2 ; 63.838,42.291 VT2.2
  Top Layer w0.6: 37.91,43.891 C5.1@39.81,43.891 ; DA1.6@38.685,33.871 39.785,33.871 41.36,33.871 44.116,33.871 48.791,33.871 DA1.3@49.335,33.871 ; DA1.5@48.346,37.271 48.346,38.405 ; 48.346,38.949 48.346,39.394 VD1.2@48.346,41.262 ; 58.225,35.738 C1.1@58.225,38.396 ; C1.1 58.495,38.261 XP6.4
  Top Layer w0.8: v1(2.349,35.109) 2.794,35.109 v1(3.238,35.109) ; v1(7.603,28.308) 7.603,28.753 v1(7.603,29.197) ; v1(8.723,43.624) 9.168,43.624 v1(9.612,43.624) ; v1(11.377,26.267) 11.377,26.711 v1(11.377,27.156) ; v1(19.449,39.866) v1(20.077,40.495) ; v1(19.716,47.788) 20.161,47.788 v1(20.605,47.788) ; v1(23.228,46.835) 23.673,46.835 v1(24.117,46.835) ; v1(24.956,37.171) 24.956,37.616 v1(24.956,38.06) ; v1(28.107,47.18) 28.107,47.625 v1(28.107,48.069) ; v1(29.527,43.63) 29.972,43.63 v1(30.416,43.63) ; v1(29.527,47.352) 29.972,47.352 v1(30.416,47.352) ; v1(32.762,45.771) 33.206,45.771 v1(33.651,45.771) ; v1(34.921,47.446) 35.365,47.446 v1(35.81,47.446) ; v1(37.91,43.447) 37.91,43.891 v1(37.91,44.336) ; 48.346,38.505 v1(47.902,38.505) v1(47.902,39.394) 48.346,39.394 v1(48.791,39.394) v1(48.791,38.505) 48.346,38.949 ; v1(57.781,35.738) 58.225,35.738 v1(58.67,35.738) ; v1(62.632,46.482) 62.632,46.927 v1(62.632,47.371) ; v1(62.632,49.911) 62.632,50.356 v1(62.632,50.8) ; v1(63.394,42.291) 63.838,42.291 v1(64.283,42.291)
  Bottom Layer w0.3: v1@19.525,39.79 v1@19.625,39.79
  Bottom Layer w0.5: U1.2 40.894,47.815 41.187,47.522 42.04,47.522 42.902,46.66 44.857,46.66 VD4.2@44.958,46.761
  Bottom Layer w0.8: v1(2.349,35.109) v1(3.238,35.109) ; v1(7.603,28.308) v1(7.603,29.197) ; v1(8.723,43.624) v1(9.612,43.624) ; v1(11.377,26.267) v1(11.377,27.156) ; v1(19.449,39.866) v1(20.077,40.495) ; v1(19.716,47.788) v1(20.605,47.788) ; v1(23.228,46.835) v1(24.117,46.835) ; v1(24.956,37.171) v1(24.956,38.06) ; v1(28.107,47.18) v1(28.107,48.069) ; v1(29.527,43.63) v1(30.416,43.63) ; v1(29.527,47.352) v1(30.416,47.352) ; v1(32.762,45.771) v1(33.651,45.771) ; v1(34.921,47.446) v1(35.81,47.446) ; v1(37.91,43.447) v1(37.91,44.336) ; v1(57.781,35.738) v1(58.67,35.738) ; v1(62.632,46.482) v1(62.632,47.371) ; v1(62.632,49.911) v1(62.632,50.8) ; v1(63.394,42.291) v1(64.283,42.291) ; v1(47.902,38.505) v1(48.791,39.394) ; v1(47.902,38.505) v1(48.791,38.505) v1(48.791,39.394) ; v1(47.902,38.505) v1(47.902,39.394) v1(48.791,39.394)
GND_pow: C2.1 C11.2 C13.1 D1.5 D2.2 DA2.3 DA2.6 R6.2 R10.2 R13.2 R15.2 VD3.2 VT1.3 XP2.2 XP5.2 | length 62
  Top Layer w0.3: R6.2@11.377,19.545 v1(11.377,21.587)
  Top Layer w0.4: 6.488,20.341 D2.2@6.488,21.831 ; 11.377,22.031 D1.5 ; v1(17.17,20.531) R10.2 ; 20.964,5.702 R15.2 ; 58.138,5.436 C11.2 ; R13.2 67.778,11.417
  Top Layer w0.6: 28.318,16.243 DA2.3@30.414,16.243 ; VD3.2@33.564,4.378 33.564,6.22
  Top Layer w0.8: v1(6.043,20.341) 6.488,20.341 v1(6.932,20.341) ; v1(11.377,21.587) 11.377,22.031 v1(11.377,22.476) ; v1(16.281,20.531) v1(17.17,20.531) ; v1(20.964,5.258) 20.964,5.702 v1(20.964,6.147) ; v1(28.318,15.799) 28.318,16.243 v1(28.318,16.688) ; v1(33.119,6.22) 33.564,6.22 v1(34.008,6.22) ; v1(58.138,4.992) 58.138,5.436 v1(58.138,5.881) ; v1(67.778,10.973) 67.778,11.417 v1(67.778,11.862)
  Top Layer w1.25: C2.1@23.912,11.608 26.452,11.608 ; v2(26.452,10.91) 26.452,11.608 ; v2(26.452,12.307) 26.452,11.608 ; C13.1 66.711,7.767 ; v2(66.711,7.069) 66.711,7.767 ; v2(66.711,8.466) 66.711,7.767
  Top Layer w1.9: v2(62.282,16.408) v2(63.298,16.408) 65.176,16.408 70.218,21.45 XP2.2
  Bottom Layer w0.8: v1(6.043,20.341) v1(6.932,20.341) ; v1(11.377,21.587) v1(11.377,22.476) ; v1(16.281,20.531) v1(17.17,20.531) ; v1(20.964,5.258) v1(20.964,6.147) ; v1(28.318,15.799) v1(28.318,16.688) ; v1(33.119,6.22) v1(34.008,6.22) ; v1(58.138,4.992) v1(58.138,5.881) ; v1(67.778,10.973) v1(67.778,11.862)
  Bottom Layer w1.25: v2(26.452,10.91) v2(26.452,12.307) ; v2(66.711,7.069) v2(66.711,8.466)
  Bottom Layer w1.9: v2(61.266,16.408) v2(62.282,16.408) v2(63.298,16.408) 65.176,16.408 70.218,21.45 XP2.2
is_chardger: C3.1 D2.8 DD1.17 | length 19.7
  Top Layer w0.3: D2.8 5.218,29.901 5.569,30.253 C3.1 10.616,30.253 13.354,32.991 13.354,38.821 13.059,39.116 DD1.17
led_b_on: DD1.11 R19.1 | length 104.5
  Top Layer w0.3: DD1.11 13.406,43.016 15.854,40.569 15.854,33.643 17.238,32.258 23.064,26.432 68.613,26.432 71.739,29.558 71.739,37.989 69.588,40.14 63.07,40.14 59.414,43.796 59.414,51.794 59.855,52.235 R19.1
led_b_power: VT4.3 XP8.4 | length 3.6
  Top Layer w0.45: VT4.3 65.885,51.255 XP8.4
led_g_on: DD1.12 R18.1 | length 101.4
  Top Layer w0.3: DD1.12 13.349,42.366 15.354,40.362 15.354,33.435 17.039,31.75 22.857,25.932 68.82,25.932 72.239,29.351 72.239,38.196 69.795,40.64 63.277,40.64 59.914,44.003 59.914,48.58 60.14,48.806 R18.1
led_g_power: VT3.3 XP8.3 | length 3.9
  Top Layer w0.45: VT3.3 67.043,47.866 67.932,48.755 XP8.3
led_r_on: DD1.13 R17.1 | length 97.8
  Top Layer w0.3: DD1.13 13.292,41.716 14.854,40.155 14.854,33.198 22.62,25.432 69.027,25.432 72.739,29.144 72.739,38.403 70.002,41.14 63.484,41.14 62.074,42.55 60.814,43.81 R17.1
led_r_power: VT2.3 XP8.2 | length 4.7
  Top Layer w0.45: VT2.3@65.921,44.513 VT2.3 66.508,44.437 68.326,46.255 XP8.2 XP8.2@69.198,46.052
NetC8_1: C8.1 DA3.3 VD2.1 | length 4.7
  Top Layer w0.4: DA3.3 C8.1 VD2.1
NetC9_1: C9.1 DD1.6 R9.2 SB1.COM | length 12.5
  Top Layer w0.3: DD1.6@18.253,40.416 18.915,40.416 20.153,41.653 20.153,43.987 ; SB1.COM@20.161,45.487 20.153,45.479 20.153,43.987 ; SB1.COM@22.311,45.487 22.311,44.029 22.352,43.987 ; R9.2 C9.1 22.352,43.987 ; 20.153,43.987 22.352,43.987
NetC14_1: C14.1 U1.1 VD5.1 | length 11.2
  Top Layer w0.3: v1(43.409,45.212) 43.411,45.215 43.411,48.497 v1(43.414,48.5)
  Bottom Layer w0.3: v1(43.409,45.212) VD5.1
  Bottom Layer w0.4: U1.1 41.849,48.494 43.409,48.494 43.424,48.51 43.424,49.569 C14.1
NetC14_2: C14.2 L3.1 U1.6 VD4.1 | length 7.8
  Bottom Layer w0.4: U1.6 C14.2 VD4.1 47.983,51.079 48.768,50.294 L3.1@48.768,49.784
NetC15_2: C15.2 L3.2 R20.1 VD5.2 XP7.1 | length 23.4
  Bottom Layer w0.3: R20.1 39.966,45.14 39.966,44.486 40.383,44.069 52.027,44.069 52.218,44.26 L3.2@52.218,49.784
  Bottom Layer w0.5: L3.2@52.218,49.784 52.768,49.784 54.864,49.784 XP7.1@56.896,49.784
NetD1_1: D1.1 R8.2 | length 1.7
  Top Layer w0.3: D1.1 R8.2
NetD1_3: D1.3 R4.2 | length 1.7
  Top Layer w0.3: D1.3 R4.2
NetD1_6: D1.6 DA2.5 R5.2 R6.1 | length 34.8
  Top Layer w0.3: R6.1 13.854,19.418 ; D1.6 13.854,19.418 ; R5.2 13.854,19.418 ; v1(25.9,7.6) 20.7,7.6 13.854,14.446 13.854,19.418 ; v1(30.9,7.6) 30.9,12.729 DA2.5@31.014,12.843
  Bottom Layer w0.3: v1(25.9,7.6) v1(30.9,7.6)
NetD1_7: D1.7 R12.1 | length 5.8
  Top Layer w0.3: D1.7 15.124,23.228 15.378,23.482 R12.1
NetD1_8: D1.8 R10.1 R11.1 | length 3.2
  Top Layer w0.3: D1.8 R10.1 R11.1
NetD2_1: D2.1 R2.1 | length 4.4
  Top Layer w0.3: R2.1 D2.1
NetDA1_2: DA1.2 L1.1 VD1.1 | length 18.6
  Top Layer w0.6: DA1.2@49.335,32.169 51.553,32.169 52.256,32.872 52.256,47.866 L1.1@52.002,48.12
NetDA2_2: DA2.2 L2.1 VD3.1 | length 18.7
  Top Layer w0.6: DA2.2@31.414,17.945 31.452,17.983 33.018,17.983 33.564,17.437 VD3.1 40.16,8.496 L2.1@40.676,7.98
NetDD1_8: DD1.8 HL1.2 | length 6.3
  Top Layer w0.3: HL1.2 17.704,44.831 19.153,43.382 19.153,42.067 18.801,41.716 DD1.8
NetHL1_1: HL1.1 R1.1 | length 3.8
  Top Layer w0.3: R1.1 HL1.1
NetHL2_1: HL2.1 R7.1 | length 1.5
  Top Layer w0.3: R7.1 HL2.1
NetHL3_1: HL3.1 R15.1 | length 1.9
  Top Layer w0.3: R15.1 HL3.1
NetR12_2: R12.2 R13.1 VT1.1 | length 61.7
  Top Layer w0.3: R12.2 v1(22.642,23.482) ; v1(26.325,22.11) 45.349,22.11 46.482,20.978 46.482,7.366 46.736,7.112 59.94,7.112 62.282,9.454 VT1.1 62.282,11.417 R13.1
  Bottom Layer w0.3: v1(22.642,23.482) 23.785,23.482 25.157,22.11 v1(26.325,22.11)
NetR14_2: R14.2 XP6.3 | length 67
  Top Layer w0.3: R14.2 16.764,33.439 23.271,26.932 68.406,26.932 71.239,29.765 71.239,35.233 70.711,35.761 XP6.3
NetR16_2: R16.2 XP6.2 | length 62.2
  Top Layer w0.3: R16.2 17.999,32.911 23.478,27.432 68.199,27.432 70.739,29.972 70.739,33.086 70.563,33.261 XP6.2
NetR17_2: R17.2 VT2.1 | length 1.5
  Top Layer w0.3: R17.2 VT2.1
NetR18_2: R18.2 VT3.1 | length 1.5
  Top Layer w0.3: R18.2 VT3.1
NetR19_2: R19.2 VT4.1 | length 1.5
  Top Layer w0.3: R19.2 VT4.1
NetR20_2: R20.2 R21.1 U1.3 | length 3.1
  Bottom Layer w0.3: U1.3 U1.3 R20.2@39.945,46.761 ; R20.2@39.947,46.736 39.972,46.761 41.262,46.761 R21.1@41.275,46.748
NetVT1_2: VT1.2 XP4.2 | length 28.1
  Top Layer w1.9: VT1.2@57.61,13.83 XP4.2
  Bottom Layer w1.9: VT1.2@57.61,13.83 XP4.2
on_chardger: DD1.14 HL2.2 R8.1 | length 16.4
  Top Layer w0.3: DD1.14 13.235,41.066 14.354,39.948 14.354,32.991 16.394,30.951 R8.1 17.409,29.935 18.095,29.249 HL2.2@18.095,28.284
on_magnit: DD1.15 R4.1 | length 11.7
  Top Layer w0.3: DD1.15 13.178,40.416 13.854,39.74 R4.1
rx1: DD1.1 R16.1 | length 1.1
  Top Layer w0.3: R16.1 DD1.1
rx2: DD1.10 R14.1 | length 8
  Top Layer w0.3: R14.1 16.764,42.665 17.115,43.016 DD1.10
pads on no net: D2.3 D2.4 D2.5 D2.6 DD1.2 DD1.3 DD1.9 DD1.16 DD1.20 VIA1.1 VIA2.1 VIA3.1 VIA4.1

## Polygon pours and split planes (outlines as drawn)
GND on Bottom Layer "GND_L02_P036" (solid, remove dead copper, pour order 36): 0,24.7 81,24.7 81,51.924 ccw(c78.931,51.924) 78.931,53.993 2.076,53.994 ccw(c2.076,51.924) 0.006,51.924
GND_pow on Bottom Layer "GND_POW_L02_P035" (solid, remove dead copper, pour order 35): 0.006,2.084 ccw(c2.097,2.084) 2.097,-0.006 78.9,-0.006 ccw(c78.905,2.089) 81,2.084 81,23.9 0,23.9
GND on Top Layer "GND_L01_P037" (solid, pour order 37): 44.958,28.194 44.958,42.164 44.704,42.418 33.02,42.418 29.972,39.37 29.972,37.078 28.2,35.306 21.555,35.306 21.067,34.818 21.067,30.716 23.843,27.94 44.704,27.94

## Silkscreen, mask and mechanical layers (free items; w line width, h text height)
Top Overlay:
  text "Baudrate" at 7.131,50.838 h1.52 r359.86
  text "blue" at 73.3,50.78 h1.52
  text "Reset" at 19.767,50.55 h1.52 r359.86
  text "green" at 73.3,48.565 h1.52
  text "debug" at 13.418,46.174 h1.52
  text "red" at 73.3,45.78 h1.52
  text "+12V" at 73.3,43.276 h1.52
  text "Gnd" at 4.729,40.411 h1.3
  text "DIO" at 4.972,38.911 h1.3
  text "Gnd" at 73.3,37.786 h1.52
  text "CLK" at 4.723,37.411 h1.3
  text "3v3" at 4.811,35.915 h1.3
  text "Tx" at 73.3,35.286 h1.52
  text "Rx" at 73.3,32.786 h1.52
  text "ST-Link" at 7.006,32.043 h1.52 r359.86
  text "+36V" at 73.3,30.286 h1.52
  text "chardger_on" at 19.396,27.099 h1.52
  text "Gnd" at 75.184,20.975 h1.52
  text "+48V" at 75.184,18.435 h1.52
  text "Chardger" at 79.429,17.708 h1.52 r90
  text "Gnd" at 75.184,13.355 h1.52
  text "+48V" at 75.184,10.815 h1.52
  text "Accumul" at 79.576,10.376 h1.52 r90
  text "Gnd" at 72.898,8.16 h1.52
  text "Magnit" at 76.535,5.353 h1.52 r90
  text "Magnit_on" at 23.591,3.665 h1.52
  text "uart_key PCB 3v6" at 6.4,2.66 h1.52
  text "+12V" at 72.39,0.791 h1.52
Bottom Overlay:
  text "GND" at 80.1,25.524 h1.52
  text "GND_pow" at 80.1,21.967 h1.52
Mechanical 1:
  the board outline again, w0.013